# Altium PCB ATLAS_XP2V5.2016.11.14_BACKUP.PcbDoc (part 2 of 3)
Units mil, origin at the board's own origin, x right, y up, seen from the top; angles counter-clockwise.
Board outline 6300 x 9190 mil, 4 copper layers (Primary Component Side, Ground Plane, Power Plane, Secondary Component Side), stack 35.4 mil thick; 150 components, 228 nets, 1053 pads, 279 vias.
Unrouted connection lines stored in the file: 9.
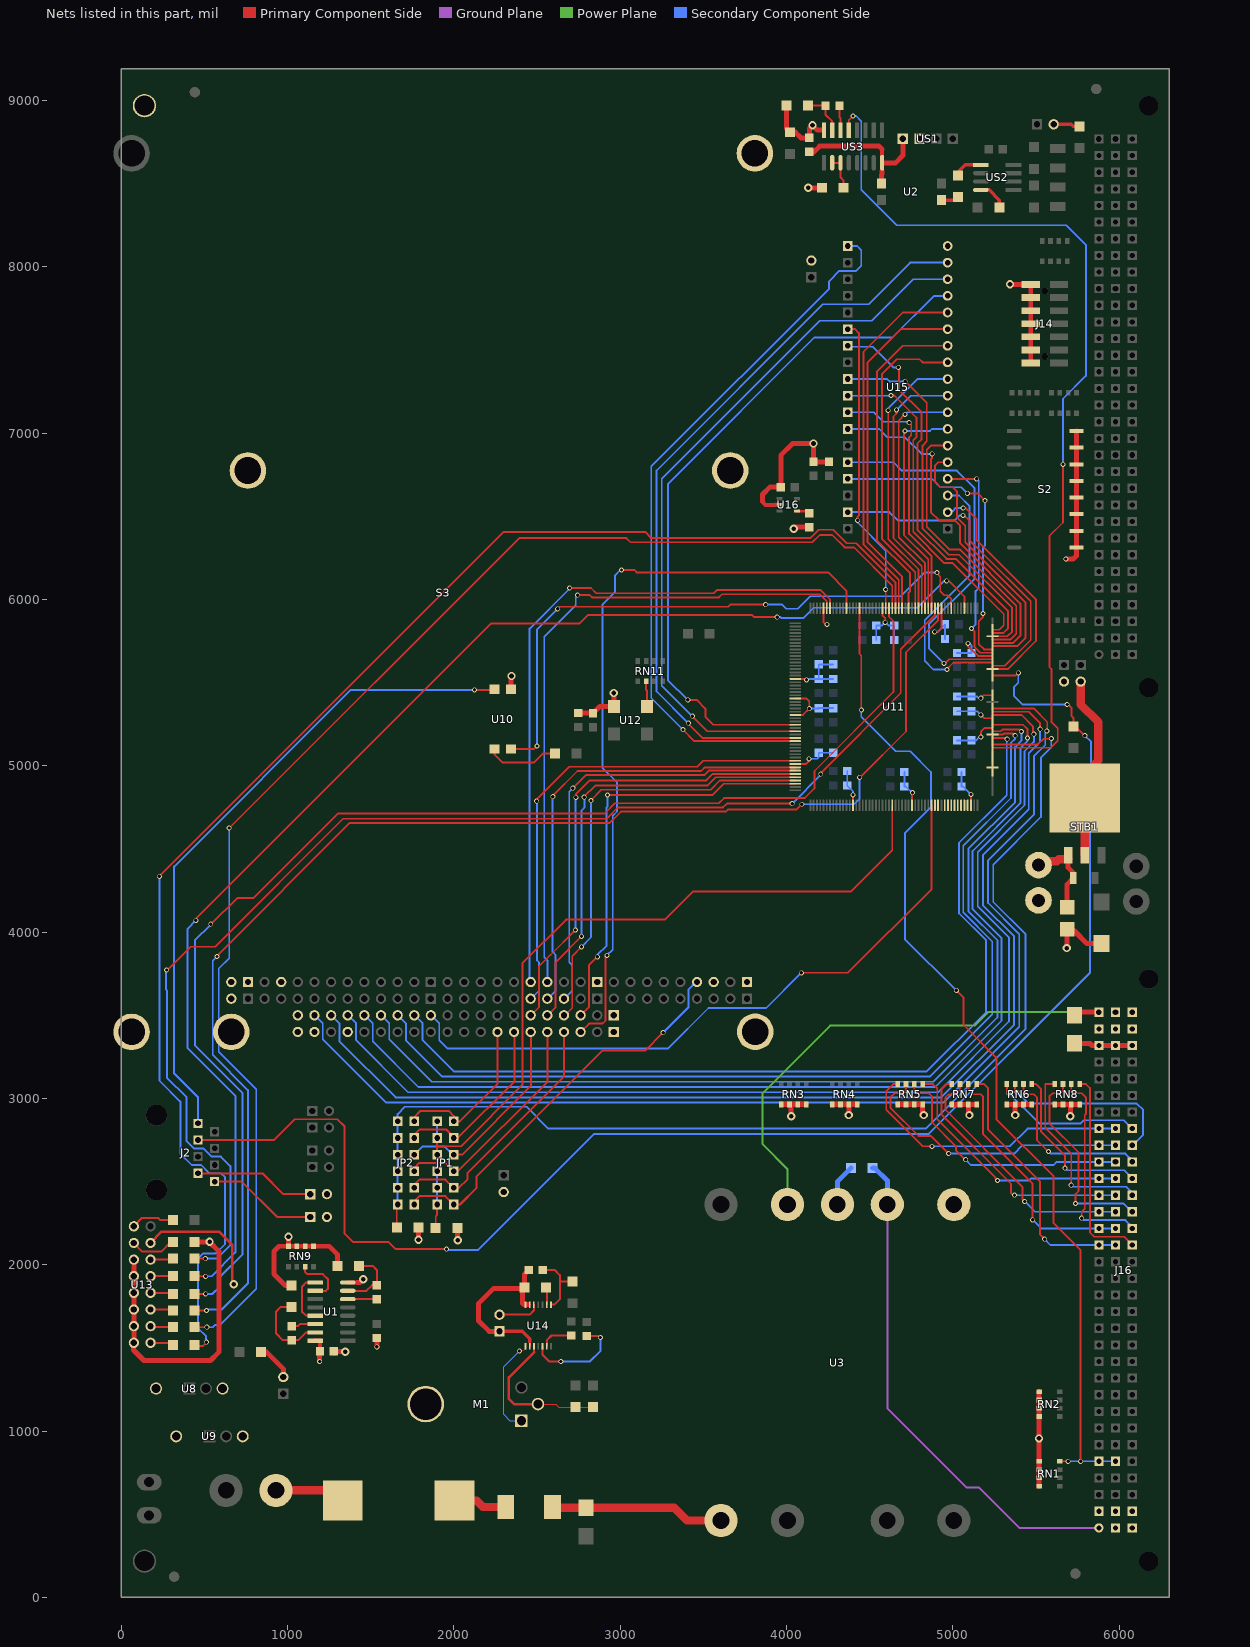
[diagram p4: the nets of this part, all layers, seen from the top]

## Via types
v1: diameter 30, hole 20, Primary Component Side to Secondary Component Side, 245 vias
v2: diameter 50, hole 28, Primary Component Side to Secondary Component Side, 34 vias

## Nets (pads, with @x,y where several pads share a name; then routed paths per layer and width w, separated by ;. In a path a pad name is that pad's centre, name@x,y a point inside that pad or via, vN(x,y) a via of type N, cw(c..) or ccw(c..) an arc to the next point about the centre after c; other vN are vias at no path point) (continued)
DATA_ISA8: S3.C11 U11.38 | length 4052.1
  Primary Component Side w11: v1(4089.16,3755.39) 4369.66,3755.39 4872.65,4258.38 U11.38@4872.65,4762.5
  Secondary Component Side w11: S3.C11@1863.75,3500 1912.5,3451.25 1912.5,3350 1962.5,3300 3287.5,3300 3531.25,3543.75 3877.52,3543.75 v1(4089.16,3755.39)
DATA_ISA9: S3.C12 U11.69 | length 5703.1
  Primary Component Side w11: U11.69@5238.45,5167.7 5318.3,5167.7 5326,5160 v1(5327,5160)
  Secondary Component Side w11: S3.C12@1763.75,3500 1812.5,3451.25 1812.5,3350 2000,3162.5 4843.75,3162.5 5200,3518.75 5200,3950 5037.5,4112.5 5037.5,4537.5 5324,4824 5324,5157 v1(5327,5160)
DATA_ISA10: S3.C13 U11.70 | length 5962.4
  Primary Component Side w11: U11.70@5238.45,5187.4 5299.9,5187.4 5306.25,5193.75 5362.5,5193.75 v1(5375,5181.25)
  Secondary Component Side w11: S3.C13@1663.75,3500 1712.5,3451.25 1712.5,3350 1931.25,3131.25 4862.5,3131.25 5237.5,3506.25 5237.5,3943.75 5062.5,4118.75 5062.5,4518.75 5350,4806.25 5350,5137.5 5375,5162.5 v1(5375,5181.25)
DATA_ISA11: S3.C14 U11.71 | length 6194.2
  Primary Component Side w11: U11.71@5238.45,5207.1 5288.35,5207.1 5300,5218.75 5400,5218.75 v1(5412.5,5206.25)
  Secondary Component Side w11: S3.C14@1563.75,3500 1612.5,3451.25 1612.5,3356.25 1868.75,3100 4881.25,3100 5268.75,3487.5 5268.75,3950 5093.75,4125 5093.75,4500 5375,4781.25 5375,5112.5 5412.5,5150 v1(5412.5,5206.25)
DATA_ISA12: S3.C15 U11.73 | length 6420.9
  Primary Component Side w11: U11.73@5238.45,5246.5 5422.25,5246.5 5450,5218.75 5450,5168 v1(5449,5167)
  Secondary Component Side w11: S3.C15@1463.75,3500 1512.5,3451.25 1512.5,3343.75 1787.5,3068.75 4893.75,3068.75 5293.75,3468.75 5293.75,3962.5 5118.75,4137.5 5118.75,4487.5 5406.25,4775 5406.25,5106.25 5450,5150 5450,5166 v1(5449,5167)
DATA_ISA13: S3.C16 U11.76 | length 6666.7
  Primary Component Side w11: U11.76@5238.45,5305.6 5413.15,5305.6 5482,5236.75 5482,5195 v1(5487,5190)
  Secondary Component Side w11: S3.C16@1363.75,3500 1412.5,3451.25 1412.5,3350 1725,3037.5 4912.5,3037.5 5337.5,3462.5 5337.5,3968.75 5150,4156.25 5150,4481.25 5431.25,4762.5 5431.25,5087.5 5487.5,5143.75 5487.5,5189.5 v1(5487,5190)
DATA_ISA14: S3.C17 U11.77 | length 6901.4
  Primary Component Side w11: U11.77@5238.45,5325.3 5455.95,5325.3 5525,5256.25 v1(5525,5220)
  Secondary Component Side w11: S3.C17@1263.75,3500 1312.5,3451.25 1312.5,3343.75 1650,3006.25 4931.25,3006.25 5368.75,3443.75 5368.75,3975 5181.25,4162.5 5181.25,4462.5 5456.25,4737.5 5456.25,5075 5525,5143.75 v1(5525,5220)
DATA_ISA15: S3.C18 U11.78 | length 7118.7
  Primary Component Side w11: U11.78@5238.45,5345 5486.25,5345 5568,5263.25 5568,5212 v1(5565,5209)
  Secondary Component Side w11: S3.C18@1163.75,3500 1212.5,3451.25 1212.5,3356.25 1593.75,2975 4943.75,2975 5400,3431.25 5400,3987.5 5212.5,4175 5212.5,4431.25 5487.5,4706.25 5487.5,5056.25 5556.25,5125 5556.25,5200.25 v1(5565,5209)
DATA_MAX0: U11.39
DATA_MAX1: U11.40
DATA_MAX2: U11.42
DATA_MAX3: U11.43
DATA_MAX4: U11.44
DATA_MAX5: U11.45
DATA_MAX6: U11.46
DATA_MAX7: U11.47
DATA_MAX8: U11.48
DATA_MAX9: U11.49
DATA_MAX10: U11.59
DATA_MAX11: U11.60
DATA_MAX12: U11.61
DATA_MAX13: U11.62
DATA_MAX14: U11.64
DATA_MAX15: U11.65
DATA_MAX_BUS0: J16.B8 J16.C8 RN5.8 | length 1712
  Primary Component Side w11: RN5.8@4668.75,3086.5 4642.75,3086.5 4600,3043.75 4600,2931.25 4818.75,2712.5 v1(4875,2712.5)
  Secondary Component Side w11: v1(4875,2712.5) 5343.75,2712.5 5449.75,2818.5 J16.C8@5878.5,2818.5 J16.B8@5978.5,2818.5
DATA_MAX_BUS1: J16.A9 J16.B9 J16.C9 RN5.7 RN6.7 | length 2790.9
  Primary Component Side w11: RN5.7@4718.75,3086.5 4718.75,3056.25 4693.75,3031.25 4650,3031.25 4625,3006.25 4625,2943.75 4793.75,2775 4868.75,2775 v1(4975,2668.75) ; RN6.7@5375,3086.5 5375,3050 v1(5387.5,3037.5)
  Secondary Component Side w11: v1(4975,2668.75) 5368.75,2668.75 5418.5,2718.5 J16.C9@5878.5,2718.5 J16.B9@5978.5,2718.5 ; v1(5387.5,3037.5) 5456.25,2968.75 6106.25,2968.75 6143.75,2931.25 6143.75,2781.25 6081,2718.5 J16.A9@6078.5,2718.5
DATA_MAX_BUS2: J16.A10 J16.B10 J16.C10 RN5.6 RN6.6 | length 2566.6
  Primary Component Side w11: RN5.6@4768.75,3086.5 4768.75,3056.25 4793.75,3031.25 4856.25,3031.25 4875,3012.5 4875,2856.25 5018.75,2712.5 5018.75,2688.25 5075,2632 v1(5077,2632) ; RN6.6@5425,3086.5 5425,3050 5450,3025 5487.5,3025 5506.25,3006.25 5506.25,2750 v1(5575,2681.25)
  Secondary Component Side w11: v1(5077,2632) 5109,2600 5606.25,2600 5624.75,2618.5 J16.C10@5878.5,2618.5 J16.B10@5978.5,2618.5 ; v1(5575,2681.25) 5587.5,2668.75 6037.5,2668.75 6078.5,2627.75 J16.A10@6078.5,2618.5
DATA_MAX_BUS3: J16.A11 J16.B11 J16.C11 RN5.5 RN6.5 | length 2552.1
  Primary Component Side w11: RN5.5@4818.75,3086.5 4880.25,3086.5 4906.25,3060.5 4906.25,2875 5256.25,2525 5256.25,2518.75 5268,2507 v1(5268.75,2507) ; RN6.5@5475,3086.5 5501,3086.5 5531.25,3056.25 5531.25,2800 5675,2656.25 v1(5675,2581.25)
  Secondary Component Side w11: v1(5268.75,2507) 5455.5,2507 5456.25,2506.25 5468.5,2518.5 J16.C11@5878.5,2518.5 J16.B11@5978.5,2518.5 ; v1(5675,2581.25) 5687.5,2568.75 6031.25,2568.75 6078.5,2521.5 J16.A11@6078.5,2518.5
DATA_MAX_BUS4: C6.1 C7.1 C42.1 D3.2 D4.2 J3.2 J16.A1 J16.A2 J16.A12 J16.B1 J16.B2 J16.B12 J16.C1 J16.C2 J16.C12 M1.2 M1.4 R2.1 R4.1 R5.1 R6.1 R7.1 R13.1 R14.1 R27.1 R28.1 RN1.1 RN1.2 RN1.3 RN1.4 RN2.1 RN2.2 RN2.3 RN2.4 RN3.1 RN3.2 RN3.3 RN3.4 RN4.1 RN4.2 RN4.3 RN4.4 RN5.1 RN5.2 RN5.3 RN5.4 RN6.1 RN6.2 RN6.3 RN6.4 RN7.1 RN7.2 RN7.3 RN7.4 RN7.8 RN8.1 RN8.2 RN8.3 RN8.4 RN8.8 RN9.1 RN9.2 RN9.3 RN9.4 S3.B3 S3.B29 S3.D16 STB1.1 U1.16 U3.6 U8.3 U13.7 U14.10 UR3.1 UR4.1 US1.2 US3.16 | length 11549.2
  Primary Component Side w6: M1.2@2506.25,1162.5 2613.12,1162.5 2631.88,1143.75 R28.1@2731.25,1143.75 R27.1@2837.5,1143.75
  Primary Component Side w11: RN7.8@4993.75,3086.5 4961.5,3086.5 4931.25,3056.25 4931.25,2906.25 5350,2487.5 5350,2431.25 5362.25,2419 v1(5371,2419) ; RN8.8@5612.5,3086.5 5556.25,3086.5 5556.25,2825 5712.5,2668.75 5712.5,2479.5 v1(5712,2479)
  Primary Component Side w12: 2482.42,1473.83 U14.10@2482.42,1508.98
  Primary Component Side w15: U13.7@177,2131.25 243.75,2200 587.5,2200 668.75,2118.75 668.75,1892.25 v2(678,1883) ; 2482.42,1473.83 2331.25,1322.67 2331.25,1193.75 2362.5,1162.5 M1.2@2506.25,1162.5
  Primary Component Side w25: U1.16@1166.5,1543.75 1195.36,1543.75 C6.1@1195.36,1479.38 ; 4208.5,8821 US3.16@4225,8821
  Primary Component Side w30: v2(1006.25,2168.75) RN9.4@1006.25,2111.5 ; R13.1@1025,1875 987.5,1875 918.75,1943.75 918.75,2081.25 949,2111.5 RN9.4@1006.25,2111.5 ; v1(1193.75,1418.75) 1193.75,1479.38 C6.1@1195.36,1479.38 ; R14.1@1300,1993.75 1300,2062.5 1251,2111.5 RN9.1@1156.25,2111.5 RN9.2@1106.25,2111.5 RN9.3@1056.25,2111.5 RN9.4@1006.25,2111.5 ; v2(1787.5,2150) R7.1@1787.5,2225 ; R4.1@2021.25,2221.25 2021.25,2149.75 v2(2023,2148) ; RN3.1@3968.75,2963.5 RN3.2@4018.75,2963.5 ; R5.1@4000,8968.75 4000,8830 R2.1@4021.25,8808.75 4053.75,8808.75 4087.5,8775 C7.1@4137.5,8775 4137.5,8831.25 v2(4156.25,8850) 4185.25,8821 4208.5,8821 ; v2(4028,2893) 4028,2954.25 RN3.2@4018.75,2963.5 ; RN3.4@4118.75,2963.5 RN3.3@4068.75,2963.5 RN3.2@4018.75,2963.5 ; v2(4131.25,8475) R6.1@4212.5,8475 ; RN4.1@4275,2963.5 RN4.2@4325,2963.5 RN4.3@4375,2963.5 ; v2(4375,2900) RN4.3@4375,2963.5 ; RN4.4@4425,2963.5 RN4.3@4375,2963.5 ; RN5.1@4668.75,2963.5 RN5.2@4718.75,2963.5 RN5.3@4768.75,2963.5 RN5.4@4818.75,2963.5 4818.75,2906.25 v2(4825,2900) ; RN7.1@4993.75,2963.5 RN7.2@5043.75,2963.5 RN7.3@5093.75,2963.5 ; v2(5100,2900) 5093.75,2906.25 RN7.3@5093.75,2963.5 ; RN7.4@5143.75,2963.5 RN7.3@5093.75,2963.5 ; RN6.1@5325,2963.5 RN6.2@5375,2963.5 ; v2(5375,2900) RN6.2@5375,2963.5 ; RN6.4@5475,2963.5 RN6.3@5425,2963.5 RN6.2@5375,2963.5 ; RN1.4@5519.75,668.75 RN1.3@5519.75,718.75 RN1.2@5519.75,768.75 RN1.1@5519.75,818.75 5519.75,881.5 5518.75,882.5 v2(5518.75,956.25) 5519.75,957.25 RN2.4@5519.75,1087.5 RN2.3@5519.75,1137.5 RN2.2@5519.75,1187.5 RN2.1@5519.75,1237.5 ; RN8.1@5612.5,2963.5 RN8.2@5662.5,2963.5 RN8.3@5712.5,2963.5 ; C42.1@5687.5,4150 5687.5,4287.5 D4.2@5725,4325 5725,4356.25 5693.75,4387.5 5693.75,4437.5 STB1.1@5693.75,4462.5 ; v2(5706.25,2893.75) 5706.25,2957.25 RN8.3@5712.5,2963.5 ; D3.2@5731.25,3501.25 5731.25,3506 5743.75,3518.5 J16.C1@5878.5,3518.5 ; RN8.4@5762.5,2963.5 RN8.3@5712.5,2963.5
  Primary Component Side w50: UR4.1@5515.62,4403.12 5515.62,4426.37 5626.62,4426.37 5637.75,4437.5 STB1.1@5693.75,4437.5
  Ground Plane w30: v2(678,1883) v2@679.75,1881.25 ; v2@2021,2150 v2(2023,2148) ; v2@4368,2893 v2(4375,2900)
  Ground Plane w50: J16.C1@5878.25,3518.75 J16.C1@5878.5,3518.5
  Power Plane w12: U3.6@4006.25,2362.5 4006.25,2575 3856.25,2725 3856.25,3031.25 4262.5,3437.5 5131.25,3437.5 5212.25,3518.5 J16.C1@5878.5,3518.5
  Secondary Component Side w11: v1(5371,2419) 5370.5,2418.5 J16.C12@5878.5,2418.5 J16.B12@5978.5,2418.5 ; v1(5712,2479) 5712,2475.5 5718.75,2468.75 6043.75,2468.75 6078.5,2434 J16.A12@6078.5,2418.5
DATA_MAX_BUS5: J16.A13 J16.B13 J16.C13 RN7.7 RN8.7 | length 2751.8
  Primary Component Side w11: RN7.7@5043.75,3086.5 5043.75,3056.25 5012.5,3025 4975,3025 4956.25,3006.25 4956.25,2931.25 5418.75,2468.75 5418.75,2393.75 5431.5,2381 v1(5432,2381) ; RN8.7@5662.5,3086.5 5662.5,3050 5643.75,3031.25 5600,3031.25 5581.25,3012.5 5581.25,2850 5756.25,2675 5756.25,2443.75 5738,2425.5 v1(5738,2369)
  Secondary Component Side w11: v1(5432,2381) 5494.25,2318.5 J16.C13@5878.5,2318.5 J16.B13@5978.5,2318.5 ; v1(5738,2369) 5738.25,2368.75 6025,2368.75 6075.25,2318.5 J16.A13@6078.5,2318.5
DATA_MAX_BUS6: J16.A14 J16.B14 J16.C14 RN7.6 RN8.6 | length 2734.5
  Primary Component Side w11: RN7.6@5093.75,3086.5 5093.75,3056.25 5125,3025 5168.75,3025 5181.25,3012.5 5181.25,2787.5 5480,2488.5 v1(5480,2270.75) ; RN8.6@5712.5,3086.5 5712.5,3050 5731.25,3031.25 5775,3031.25 5800,3006.25 5800,2906.25 5793.75,2900 5793.75,2337.5 5775,2318.75 v1(5775,2280)
  Secondary Component Side w11: v1(5480,2270.75) 5532.5,2218.5 J16.C14@5878.5,2218.5 J16.B14@5978.5,2218.5 ; v1(5775,2280) 5786.25,2268.75 6037.5,2268.75 6078.5,2227.75 J16.A14@6078.5,2218.5
DATA_MAX_BUS7: J16.A15 J16.B15 J16.C15 RN7.5 RN8.5 | length 2796.6
  Primary Component Side w11: RN7.5@5143.75,3086.5 5188.5,3086.5 5212.5,3062.5 5212.5,2812.5 5525,2500 5525,2181 v1(5552,2154) ; RN8.5@5762.5,3086.5 5801,3086.5 5825,3062.5 5825,2193.75 5850,2168.75 6031.25,2168.75 6078.5,2121.5 J16.A15@6078.5,2118.5
  Secondary Component Side w11: v1(5552,2154) 5587.5,2118.5 J16.C15@5878.5,2118.5 J16.B15@5978.5,2118.5
DATA_MAX_BUS8: J16.A8 RN6.8 | length 905.1
  Primary Component Side w11: RN6.8@5325,3086.5 5325,3043.75 v1(5337.5,3031.25)
  Secondary Component Side w11: v1(5337.5,3031.25) 5518.75,2850 5768.75,2850 5787.5,2868.75 6028.25,2868.75 J16.A8@6078.5,2818.5
E/D: RN11.6 U12.1 | length 153.6
  Primary Component Side w11: RN11.6@3156.25,5507.25 3156.25,5456.25 3162.5,5450 U12.1@3162.5,5356.25
GND: C6.2 C7.2 C9.2 C10.2 C13.2 C14.2 C15.2 C16.2 C17.2 C18.2 C19.2 C20.2 C21.2 C22.2 C23.2 C24.2 C25.2 C26.2 C27.2 C28.2 C29.2 C30.2 C31.2 C32.2 C33.2 C34.2 C35.2 C36.2 C37.2 C38.2 C39.2 C40.2 C41.2 C42.2 C43.1 C46.2 C47.2 C48.2 C49.2 C50.2 D3.1 J4.2 J11.2 J13.2 J14.1 J14.3 J14.5 J14.7 J14.9 J14.11 J14.13 J15.1 J16.A3 J16.A31 J16.A32 J16.B3 J16.B31 J16.B32 J16.C3 J16.C31 J16.C32 J18.2 JP4.2 JP5.2 R9.2 R12.2 R23.2 R29.1 S2.9 S2.10 S2.11 S2.12 S2.13 S2.14 S2.15 S2.16 S3.A32 S3.B1 S3.B10 S3.B31 S3.B32 S3.C0 S3.C19 S3.D0 S3.D18 S3.D19 S3.MTH1 S3.MTH2 S3.MTH3 S3.MTH4 S3.MTH5 S3.MTH7 STB1.2 STB1.4 U1.8 U2.3 U3.8 U3.9 U4.1 U8.4 U9.3 U9.4 U10.3 U11.14 U11.32 U11.50 U11.72 U11.75 U11.82 U11.94 U11.116 U11.134 U11.152 U11.174 U11.180 U11.185 U11.200 U12.2 U13.9 U13.10 U13.11 U13.12 U13.13 U13.14 U14.6 U14.7 U14.9 U15.18 U16.2 US1.1 US3.8 | length 15854.4
  Primary Component Side w11: 2448,1760.5 U14.6@2457.25,1760.5 ; U11.200@4053.75,5010.1 4116.35,5010.1 4136,5029.75 v1(4136,5042) ; U11.185@4053.75,5305.6 4099.35,5305.6 v1(4137.5,5343.75) 4137.5,5387.5 4120.9,5404.1 U11.180@4053.75,5404.1 ; U11.174@4053.75,5522.3 4115.7,5522.3 v1(4121,5517) ; U11.152@4222.55,5947.2 4222.55,5863 4235.55,5850 v1(4243.75,5850) ; U11.14@4399.85,4762.5 4400,4819.05 v1(4400,4825) ; U11.134@4577.15,5947.2 4577.15,5904.1 4593.75,5887.5 v1(4593.75,5862.5) ; U11.32@4754.45,4762.5 4754.45,4834.45 v1(4758,4838) ; v1(4891,5805) 4889.75,5806.25 4912.5,5806.25 4931.75,5825.5 U11.116@4931.75,5947.2 ; v1(5091,5736) 5091,5718.75 5152.3,5660.2 U11.94@5238.45,5660.2 ; v1(5168.75,5306.25) 5189.1,5285.9 U11.75@5238.45,5285.9 ; v1(5168.75,5406.25) 5186.3,5423.8 U11.82@5238.45,5423.8 ; v1(5169,5173) 5170,5174 5170,5207.5 5189.3,5226.8 U11.72@5238.45,5226.8
  Primary Component Side w12: U14.9@2456.83,1508.98 2456.83,1536.92 ; U11.50@5109.05,4762.5 v1(5109.05,4828.45)
  Primary Component Side w20: J15.1@2275,1600 2412.5,1600 2456.83,1555.67 2456.83,1536.92 ; 3937.6,6568.85 U16.2@3957.5,6568.85
  Primary Component Side w25: U1.8@1362.5,1893.75 1418.75,1893.75 ; 3856.25,6587.5 3875,6568.75 3937.5,6568.75 3937.6,6568.85 ; 4575,8575 US3.8@4575,8625 ; 4575,8706.25 US3.8@4575,8625 ; 4587.5,8625 US3.8@4575,8625
  Primary Component Side w30: U13.14@77,2031.25 U13.13@77,1931.25 U13.12@77,1831.25 U13.11@77,1731.25 U13.10@77,1631.25 U13.9@77,1531.25 75,1487.5 137.5,1425 537.5,1425 587.5,1475 587.5,2081.5 531.5,2137.5 v2(532,2138) 443,2138 R23.2@442.5,2137.5 ; R12.2@842.5,1475 875,1475 975,1375 JP4.2@975,1325 ; C6.2@1279.36,1479.38 1279.36,1469.38 1289.36,1469.38 1299.22,1479.23 1348.28,1479.23 v2(1348.28,1478.06) 1350,1476.34 v2@1350,1468.75 ; 1418.75,1893.75 1437.5,1893.75 v2(1456.25,1912.5) ; C10.2@1537.5,1559.75 1537.5,1507.59 1537.85,1507.59 v1(1537.85,1507.04) ; J15.1@2275,1600 2212.5,1600 2150,1662.5 2150,1768.75 2237.5,1856.25 R29.1@2418.75,1856.25 ; U10.3@2343.75,5460 2343.75,5536.75 v2(2347,5540) ; 2448,1760.5 U14.7@2431.25,1760.5 2420.75,1760.5 2412.5,1768.75 2412.5,1850 R29.1@2418.75,1856.25 ; C43.1@2450,1968.75 2425,1943.75 R29.1@2425,1862.5 R29.1@2418.75,1856.25 ; C39.2@2748.25,5317 2835.75,5317 C48.2@2837.5,5315.25 2878.5,5356.25 U12.2@2962.5,5356.25 v2(2962.5,5437.5) ; 3856.25,6587.5 3856.25,6631.25 3900,6675 C13.2@3966,6675 3966,6866 4037.5,6937.5 v2(4162.5,6937.5) C46.2@4162.5,6827.75 C9.2@4256.25,6827.75 ; v2(4043.75,6425) 4053.5,6434.75 C49.2@4137.5,6434.75 ; C7.2@4137.5,8691 4166,8691 4200,8725 4556.25,8725 4575,8706.25 ; U2.3@4571.25,8500 4571.25,8552.5 4575,8556.25 4575,8575 ; 4587.5,8625 4656.25,8625 4700,8668.75 US1.1@4700,8768.75 ; v2(5344,7895) 5343.75,7894.75 5343.75,7893.75 J14.1@5468.75,7893.75 J14.3@5468.75,7815.05 J14.5@5468.75,7736.25 J14.7@5468.75,7657.53 J14.9@5468.75,7578.75 J14.11@5468.75,7500.05 J14.13@5468.75,7421.32 ; v1(5680,6243) 5724.25,6243 5743.75,6262.5 S2.9@5743.75,6312.5 S2.10@5743.75,6412.5 S2.11@5743.75,6512.5 S2.12@5743.75,6612.5 S2.13@5743.75,6712.5 S2.14@5743.75,6812.5 S2.15@5743.75,6912.5 S2.16@5743.75,7012.5 ; v2(5686,3904) 5687.5,3902.5 C42.2@5687.5,4018 5718.75,4018 5730.5,4006.25 5731.25,4006.25 5806.25,3931.25 C41.2@5893.75,3931.25 ; D3.1@5731.25,3331.25 5825,3331.25 5837.25,3318.5 J16.C3@5878.5,3318.5 J16.B3@5978.5,3318.5 J16.A3@6078.5,3318.5 ; STB1.4@5793.75,4806.25 STB1.4@5918.75,4806.25
  Primary Component Side w50: J11.2@5768.75,5506.25 5768.75,5368.75 5875,5262.5 5875,5031.25 5793.75,4950 STB1.4@5793.75,4806.25 STB1.2@5793.75,4462.5
  Ground Plane w12: U3.8@4606.25,2362.5 4606.25,1137.5 5081.25,662.5 5156.25,662.5 5400.25,418.5 J16.C32@5878.5,418.5
  Power Plane w11: v1(4121,5517) 4121,5521.85 v1@4121.45,5522.3 ; v1@4136,5039 v1(4136,5042) ; v1(4758,4838) v1@4762.5,4842.5 ; v1(4891,5805) v1@4893.75,5802.25
  Power Plane w30: v2(532,2138) v2@532.5,2137.5 ; v2(2347,5540) v2@2348,5541 ; v2@5344,7894 v2(5344,7895) ; J13.2@5668.75,5506.25 J13.2@5668.75,5512.5 ; J16.C3@5878.25,3318.75 J16.C3@5878.5,3318.5
  Secondary Component Side w11: v1(4121,5517) 4126.3,5521.5 C37.2@4193.75,5521.5 ; v1(4136,5042) 4185.75,5042 4193.75,5050 C35.2@4193.75,5078.5 C14.2@4281.25,5078.5 ; v1(4137.5,5343.75) 4191,5343.75 C15.2@4193.75,5346.5 ; C15.2@4190.25,5346.5 C15.2@4193.75,5346.5 ; C36.2@4281.25,5346.5 C15.2@4193.75,5346.5 ; C18.2@4281.25,5521.5 C37.2@4193.75,5521.5 ; C19.2@4281.25,5609.75 C38.2@4193.75,5609.75 C37.2@4193.75,5521.5 ; C27.2@4365.25,4968.75 C16.2@4365.25,4881.25 4400,4846.5 v1(4400,4825) ; C20.2@4540.25,5756.25 C50.2@4540.25,5843.75 4575,5843.75 v1(4593.75,5862.5) 4612.5,5843.75 C40.2@4647.25,5843.75 C21.2@4647.25,5756.25 ; C25.2@4709,4962.5 C17.2@4709,4875 4718.75,4875 4755.75,4838 v1(4758,4838) ; v1(4891,5805) 4908.5,5805 C34.2@4953.5,5850 C22.2@4953.5,5762.5 ; C24.2@5025,5327.75 C30.2@5112.5,5327.75 5147.25,5327.75 v1(5168.75,5306.25) ; C23.2@5025,5416 C32.2@5112.5,5416 5146.5,5416 5156.25,5406.25 v1(5168.75,5406.25) ; C26.2@5025,5677.75 C33.2@5112.5,5677.75 5112.5,5725 5101.5,5736 v1(5091,5736) ; C29.2@5052.75,4875 C29.2@5056.25,4875 ; C47.2@5052.75,4962.5 5052.75,4878.5 C29.2@5056.25,4875 ; v1(5109.05,4828.45) 5062.5,4875 C29.2@5056.25,4875 ; C31.2@5112.5,5152.75 5140.25,5152.75 5160.75,5173.25 5168.75,5173.25 v1(5169,5173)
  Secondary Component Side w12: C28.2@5025,5152.75 C31.2@5112.5,5152.75
  Secondary Component Side w30: R9.2@4517.5,2581.25 4531.25,2581.25 4606.25,2506.25 U3.8@4606.25,2362.5
IOCS16: S3.D2 U11.145 | length 4524.8
  Primary Component Side w11: S3.D2@2750,3400 S3.D2@2762.5,3400 2763.75,3400 2813.75,3450 2893.75,3450 2912.5,3468.75 2912.5,3851.5 v1(2921,3860) ; v1(3008,6177) 3086.75,6177 3099.25,6162.5 4251.25,6162.5 4360.45,6052.05 U11.145@4360.45,5947.2
  Secondary Component Side w11: v1(2921,3860) 2956.25,3895.25 2956.25,4700 2981.25,4725 2981.25,4900 2893.75,4987.5 2893.75,5968.75 2968.75,6043.75 2968.75,6143.75 3002,6177 v1(3008,6177)
IORD: S3.B14 U11.150 | length 4134
  Primary Component Side w11: v1(2697,6069) 2697.25,6068.75 2825,6068.75 2856.25,6037.5 3562.5,6037.5 3581.25,6056.25 4206.25,6056.25 4261.95,6000.55 U11.150@4261.95,5947.2
  Secondary Component Side w11: S3.B14@2463.75,3700 2456.25,3707.5 2456.25,5825 2697,6065.75 v1(2697,6069)
IOWR: S3.B13 U11.151 | length 3988.2
  Primary Component Side w11: v1(2745.25,6026) 2817.75,6026 2831.25,6012.5 3593.75,6012.5 3612.5,6031.25 4200,6031.25 4242.25,5989 U11.151@4242.25,5947.2
  Secondary Component Side w11: S3.B13@2563.75,3700 S3.B13@2562.5,3700 2562.5,3831.25 2543.75,3850 2543.75,5775 2733,5964.25 2733,6014 v1(2745.25,6026)
IQ_I_SYN: U11.66 US3.13 | length 5561
  Primary Component Side w11: US3.13@4375,8821 4375,8881.25 v1(4400,8906.25) ; U11.66@5238.45,5108.6 5589.65,5108.6 5631.25,5149.7 5631.25,5225.3 5593.75,5262.3 5593.75,5581.25 5581.25,5593.75 5581.25,6381.25 5662.5,6462.5 v1(5662.5,6812.5)
  Secondary Component Side w11: v1(4400,8906.25) 4418.75,8906.25 4450,8875 4450,8462.5 4662.5,8250 5681.25,8250 5800,8131.25 5800,7343.75 5662.5,7206.25 v1(5662.5,6812.5)
IQ_O_ATP: JP1.2 JP1.4 JP1.6 JP1.8 JP1.10 JP1.12 R4.2 U11.26 | length 4816.8
  Primary Component Side w11: R4.2@1891.25,2221.25 1891.25,2291.25 1900,2300 JP1.2@1900,2362.5 ; JP1.8@1900,2662.5 1900,2712.5 ; JP1.10@1900,2762.5 1900,2712.5 ; U11.26@4636.25,4762.5 4636.25,4492.5 4387.5,4243.75 3437.5,4243.75 3268.75,4075 2675,4075 2412.5,3812.5 2412.5,3081.25 2043.75,2712.5 1900,2712.5
  Secondary Component Side w11: JP1.2@1900,2362.5 JP1.4@1900,2462.5 JP1.6@1900,2562.5 JP1.8@1900,2662.5 ; JP1.10@1900,2762.5 JP1.12@1900,2862.5
IQ_O_SYN: JP2.2 JP2.4 JP2.6 JP2.8 JP2.10 JP2.12 R7.2 U11.67 | length 7117.6
  Primary Component Side w11: R7.2@1657.5,2225 1657.5,2357.5 JP2.2@1662.5,2362.5 ; U11.67@5238.45,5128.3 5511.38,5128.3 5545.58,5162.5 5591.03,5162.5 v1(5592,5164)
  Secondary Component Side w11: JP2.2@1662.5,2362.5 JP2.4@1662.5,2462.5 JP2.6@1662.5,2562.5 JP2.8@1662.5,2662.5 JP2.10@1662.5,2762.5 JP2.12@1662.5,2862.5 1662.5,2906.25 1706.25,2950 2437.5,2950 2568.75,2818.75 4837.5,2818.75 5437.5,3418.75 5437.5,3987.5 5243.75,4181.25 5243.75,4406.25 5529.5,4692 5529.5,5048.25 5592,5110.75 v1(5592,5164)
IRQ9: JP1.1 JP2.1 S3.B4 | length 2410.5
  Primary Component Side w12: JP2.1@1762.5,2362.5 1762.5,2381.25 1793.75,2412.5 1950,2412.5 JP1.1@2000,2362.5 2037.5,2362.5 2137.5,2462.5 2137.5,2531.25 2893.75,3287.5 3150,3287.5 3256.5,3394 3257,3394 v1(3259,3396)
  Secondary Component Side w12: v1(3259,3396) 3261,3398 3261,3398.5 3412.5,3550 3412.5,3656.25 3456.25,3700 S3.B4@3462.5,3700 S3.B4@3463.75,3700
IRQ10: JP1.3 JP2.3 S3.D3 | length 1520.6
  Primary Component Side w12: JP2.3@1762.5,2462.5 1762.5,2481.25 1793.75,2512.5 1950,2512.5 JP1.3@2000,2462.5 2031.25,2462.5 2081.25,2512.5 2081.25,2550 2663.75,3132.5 S3.D3@2663.75,3400
IRQ11: JP1.5 JP2.5 S3.D4 | length 1375.7
  Primary Component Side w12: JP2.5@1762.5,2562.5 1762.5,2581.25 1793.75,2612.5 1950,2612.5 JP1.5@2000,2562.5 2024.65,2562.5 2563.75,3100.35 S3.D4@2563.75,3400
IRQ12: JP1.7 JP2.7 S3.D5 | length 1238.1
  Primary Component Side w12: JP1.7@2000,2662.5 2049.83,2662.5 2463.75,3075.17 S3.D5@2463.75,3400
  Secondary Component Side w12: JP2.7@1762.5,2662.5 1812.5,2712.5 1943.75,2712.5 1993.75,2662.5 JP1.7@2000,2662.5
IRQ14: JP1.11 JP2.11 S3.D7 | length 991.1
  Primary Component Side w12: JP2.11@1762.5,2862.5 1762.5,2887.5 1800,2925 1968.75,2925 2000,2893.75 JP1.11@2000,2862.5 2037.12,2862.5 2263.75,3087.88 S3.D7@2263.75,3400
IRQ15: JP1.9 JP2.9 S3.D6 | length 1096.6
  Primary Component Side w12: JP2.9@1762.5,2762.5 1762.5,2781.25 1793.75,2812.5 1956.25,2812.5 2000,2768.75 JP1.9@2000,2762.5 2024.72,2762.5 2363.75,3100.27 S3.D6@2363.75,3400
LA17: S3.A14 U11.199 | length 2876
  Primary Component Side w11: v1(2498,4787) 2498,4798 2693.75,4993.75 3462.5,4993.75 3498.55,5029.8 U11.199@4053.75,5029.8
  Secondary Component Side w11: S3.A14@2463.75,3600 2512.5,3648.75 2512.5,3818.75 2500,3831.25 2500,4785 v1(2498,4787)
LA18: S3.A13 U11.201 | length 2779.3
  Primary Component Side w11: v1(2596,4814) 2596,4821 2743.73,4968.73 3487.5,4968.75 3509.15,4990.4 U11.201@4053.75,4990.4
  Secondary Component Side w11: S3.A13@2563.75,3600 2612.5,3648.75 2612.5,3862.5 2593.75,3881.25 2593.75,4812.5 2596,4814.75 v1(2596,4814)
LA19: S3.A12 U11.202 | length 2684.9
  Primary Component Side w11: v1(2716,4865) 2716,4866 2793.75,4943.75 3506.25,4943.75 3533.2,4970.7 U11.202@4053.75,4970.7
  Secondary Component Side w11: S3.A12@2663.75,3600 2712.5,3648.75 2712.5,3800 2693.75,3818.75 2693.75,4843.75 2715,4865 v1(2716,4865)
LA20: S3.C5 U11.203 | length 2810.6
  Primary Component Side w11: S3.C5@2463.75,3500 2512.5,3548.75 2512.5,3793.75 2581.25,3862.5 2581.5,3862.5 v1(2731.25,4012.25) ; v1(2734,4810) 2734,4827.75 2818.75,4912.5 3518.75,4912.5 3557.25,4951 U11.203@4053.75,4951
  Secondary Component Side w11: v1(2731.25,4012.25) 2731.25,4807.25 v1(2734,4810)
LA21: S3.C4 U11.204 | length 2725
  Primary Component Side w11: S3.C4@2563.75,3500 2612.5,3548.75 2612.5,3818.75 2612.75,3818.75 2626.94,3832.99 v1(2768,3974.5) ; v1(2784,4811) 2784,4816.2 2851.3,4881.25 3525,4881.25 3575.05,4931.3 U11.204@4053.75,4931.3
  Secondary Component Side w11: v1(2768,3974.5) 2768,4730.5 2785,4747.5 2785,4810 v1(2784,4811)
LA22: S3.C3 U11.205 | length 2641.2
  Primary Component Side w11: S3.C3@2663.75,3500 2668.75,3500 2712.5,3543.75 2712.5,3856.25 2768,3911.75 v1(2768,3912) ; v1(2825,4790) 2825,4793.75 2887.5,4856.25 3543.75,4856.25 3599.1,4911.6 U11.205@4053.75,4911.6
  Secondary Component Side w11: v1(2768,3912) 2768.25,3912 2825,3968.75 v1(2825,4790)
LA23: S3.C2 U11.206 | length 2547.8
  Primary Component Side w11: S3.C2@2763.75,3500 2812.5,3548.75 2812.5,3800.5 v1(2863,3851) ; v1(2924,4824) 2966.25,4824 2969,4825 3556.25,4825 3623.15,4891.9 U11.206@4053.75,4891.9
  Secondary Component Side w11: v1(2863,3851) 2863,3863 2918.75,3918.75 2918.75,4750 2924,4756 v1(2924,4824)
LED_KVR: R18.2 U11.131 | length 8352.9
  Primary Component Side w11: R18.2@442.5,1625 v1(515,1625) ; v1(650,4626) 651,4626 2393.75,6368.75 3037.5,6368.75 3062.5,6343.75 4156.25,6343.75 4200,6387.5 4275,6387.5 4350,6312.5 4406.25,6312.5 4636.25,6082.5 U11.131@4636.25,5947.2
  Secondary Component Side w11: v1(515,1625) 550.5,1625 563,1637.5 593.75,1637.5 812.5,1856.25 812.5,3056.25 587.5,3281.25 587.5,3781.25 650,3843.75 v1(650,4626)
LED_LPT: R20.2 U11.132 | length 7822.9
  Primary Component Side w11: 796.5,4206.25 1302.75,4712.5 2906.25,4712.5 2967,4775 3593.75,4775 3625,4806.25 4110.75,4806.25 4168.75,4864.25 4168.75,4968.75 4643.75,5443.75 4643.75,5868.75 4616.55,5895.95 U11.132@4616.55,5947.2
  Primary Component Side w12: R20.2@442.5,1825 v1(508,1825) ; v1(539,4048) 700,4206.25 796.5,4206.25
  Secondary Component Side w12: v1(508,1825) 549.55,1825 593.75,1867.68 593.75,1926.5 731.25,2064 731.25,3031.25 443.75,3318.75 443.75,3950 539,4045.25 v1(539,4048)
LED_MASTER_ENABLE: R21.2 U11.109 | length 8037.1
  Primary Component Side w11: R21.2@442.5,1931.25 508.25,1931.25 v1(508,1931) ; v1(449,4071) 449,4080.25 2225,5856.25 2756.25,5856.25 2806.25,5906.25 3793.75,5906.25 3806.25,5893.75 v1(3943.75,5893.75) ; v1(4963,6112) 4963.5,6112.5 4975,6112.5 5069.65,6017.85 U11.109@5069.65,5947.2
  Secondary Component Side w11: v1(449,4071) 400,4019.25 400,3302.75 687.5,3015.25 687.5,2074.75 543.75,1931 v1(508,1931) ; v1(3943.75,5893.75) 3964.25,5893.75 3970,5888 4100.5,5888 4162.5,5950 4787.5,5950 4950,6112.5 4962.5,6112.5 v1(4963,6112)
LED_PWR_GOOD_TPS: R22.2 U11.118 | length 7834.4
  Primary Component Side w11: v1(274,3772) 278.25,3772 418.75,3912.5 565.25,3912.5 1334,4681.25 2918.75,4681.25 2987.5,4750 3617.67,4750 3642.67,4773 4033,4773 v1(4034,4772) ; v1(4206.25,4950) 4206.25,4956.25 4687.5,5437.5 4687.5,5700 4892.35,5904.85 U11.118@4892.35,5947.2
  Primary Component Side w12: R22.2@442.5,2037.5 443,2037 v1(506,2037)
  Secondary Component Side w11: v1(4034,4772) 4034.65,4772 4206.25,4946.58 v1(4206.25,4950)
  Secondary Component Side w12: v1(274,3772) 268.75,3766.75 268.75,3656.25 275,3650 275,3125 393.75,3006.25 393.75,2743.75 437.5,2700 493.75,2700 543.75,2650 600,2650 656.25,2593.75 656.25,2118.75 574.5,2037 v1(506,2037)
LED_RAD: R17.2 U11.130 | length 8857.3
  Primary Component Side w11: v1(230,4335.5) 2301.23,6406.25 3150,6406.25 3187.5,6368.75 4143.75,6368.75 4193.75,6418.75 4281.25,6418.75 4362.5,6337.5 4418.75,6337.5 4655.95,6100.3 U11.130@4655.95,5947.2 ; R17.2@442.5,1518.75 448.75,1512.5 493.75,1512.5 511,1529.75 511,1534 v1(512,1535)
  Secondary Component Side w11: v1(230,4335.5) 230,3338.25 231,3337.25 231,3106.5 356.25,2981.25 356.25,2668.75 425,2600 481.25,2600 531.25,2550 600,2550 625,2525 625,2125 568.75,2068.75 494.62,2068.75 462.5,2036.63 462.5,1618.75 511,1570.25 511,1536 v1(512,1535)
LED_WDT: R19.2 U11.117 | length 8052.8
  Primary Component Side w11: R19.2@442.5,1725 v1(513,1725) ; v1(577,3853) v1@577,3858.25 ; 2937.5,4656.25 3006.25,4725 3637.5,4725 3650,4737.5 4061,4737.5 v1(4092.25,4768.75) ; v1(4440,4931) 4443.5,4931 4718.75,5206.25 4718.75,5682.15 4912.05,5875.45 U11.117@4912.05,5947.2
  Primary Component Side w12: v1@577,3858.25 1375,4656.25 2937.5,4656.25
  Secondary Component Side w11: v1(4092.25,4768.75) 4406.25,4768.75 4440,4802.5 v1(4440,4931)
  Secondary Component Side w12: v1(513,1725) 519.25,1731.25 606.25,1731.25 762.5,1887.5 762.5,3050 551,3261.5 551,3827 v1(577,3853)
MASTER_ENABLE: U10.2 U11.113 | length 3691.8
  Primary Component Side w11: U10.2@2343.75,5100 2481.25,5100 v1(2500,5118.75) ; v1(2625,5943.75) 2637.5,5956.25 3650,5956.25 3662.5,5968.75 v1(3875,5968.75) ; v1(4905,6161) 4905,6157.5 4925,6137.5 4925,6050 4950,6025 4968.75,6025 4990.85,6002.9 U11.113@4990.85,5947.2
  Secondary Component Side w11: v1(2500,5118.75) 2500,5818.75 v1(2625,5943.75) ; v1(3875,5968.75) 3975,5968.75 4000,5943.75 4068.75,5943.75 4143.75,6018.75 4687.5,6018.75 4829.75,6161 v1(4905,6161)
MASTER_ENABLE_OUT: J2.1 U10.4 | length 3969.9
  Primary Component Side w12: v1(2125,5456.25) 2240,5456.25 U10.4@2243.75,5460
  Secondary Component Side w12: J2.1@462.5,2850 462.5,3006.25 318.75,3150 318.75,4393.75 1381.25,5456.25 v1(2125,5456.25)
MRST: J16.B28 J16.C28 RN1.8 U11.141 | length 6196.3
  Primary Component Side w11: U11.141@4439.25,5947.2 4439.25,5673.25 4450,5662.5 v1(4450,5335) ; v1(5021,3650) 5063.5,3607.5 5063.5,3444.75 5262.5,3245.75 5262.5,2875 5606.25,2531.25 5606.25,2250 5768.75,2087.5 v1(5768.75,818.75) ; RN1.8@5642.75,818.75 v1(5693.75,818.75)
  Secondary Component Side w11: v1(4450,5335) 4450,5293.75 4656.25,5087.5 4743.75,5087.5 4868.75,4962.5 4868.75,4750 4712.5,4593.75 4712.5,3957.5 5020,3650 v1(5021,3650) ; v1(5693.75,818.75) v1(5768.75,818.75) 5878.25,818.75 J16.C28@5878.5,818.5 J16.B28@5978.5,818.5
MS_IN_1: J2.3 R15.1 U11.88 | length 9146.8
  Primary Component Side w11: U11.88@5238.45,5542 5376.75,5542 v1(5393.75,5559) ; R15.1@5725,5237.5 5737.5,5237.5 v1(5793.75,5181.25)
  Primary Component Side w12: J2.3@462.5,2750 918.75,2750 1043.75,2875 1300,2875 1343.75,2831.25 1343.75,2187.5 1393.75,2137.5 1606.25,2137.5 1650,2093.75 v1(1956.25,2093.75) ; v1(5687.5,5368.75) 5693.75,5368.75 5712.5,5350 5712.5,5300 5725,5287.5 R15.1@5725,5237.5
  Secondary Component Side w11: v1(5393.75,5559) 5393.75,5500 5368.75,5475 5368.75,5418.75 5418.75,5368.75 v1(5687.5,5368.75)
  Secondary Component Side w12: v1(1956.25,2093.75) 1962.5,2087.5 2143.75,2087.5 2843.75,2787.5 4856.25,2787.5 5825,3756.25 5825,4900 5831.25,4906.25 5831.25,5143.75 v1(5793.75,5181.25)
NetC2_1: C2.1 US3.14 | length 150.3
  Primary Component Side w12: C2.1@4318.75,8968.75 4318.75,8900 4325,8893.75 US3.14@4325,8821
NetC2_2: C2.2 R5.2 US3.15 | length 269.2
  Primary Component Side w12: R5.2@4130,8968.75 C2.2@4234.75,8968.75 4234.75,8915.25 4275,8875 US3.15@4275,8821
NetC11_1: C11.1 U1.14 | length 146.7
  Primary Component Side w12: C11.1@1025,1631.25 1062.5,1631.25 1075,1643.75 U1.14@1166.5,1643.75
NetC11_2: C11.2 R13.2 U1.15 | length 507.1
  Primary Component Side w12: R13.2@1025,1745 957.5,1745 931.25,1718.75 931.25,1587.5 971.5,1547.25 C11.2@1025,1547.25 1066,1547.25 1112.5,1593.75 U1.15@1166.5,1593.75
NetC12_1: C12.1 U1.6 | length 175
  Primary Component Side w12: U1.6@1362.5,1793.75 C12.1@1537.5,1793.75
NetC12_2: C12.2 R14.2 U1.7 | length 397.9
  Primary Component Side w12: U1.7@1362.5,1843.75 1475,1843.75 1509,1877.75 C12.2@1537.5,1877.75 1537.5,1968.75 1512.5,1993.75 R14.2@1430,1993.75
NetC43_2: C43.2 R26.2 U14.1 | length 401.7
  Primary Component Side w12: C43.2@2534,1968.75 2606.25,1968.75 2637.5,1937.5 2637.5,1898.75 ; U14.1@2584.78,1760.5 2604.25,1760.5 2637.5,1793.75 2637.5,1898.75 ; R26.2@2712.5,1898.75 2637.5,1898.75
NetC44_1: C44.1 U14.13 | length 196.3
  Primary Component Side w12: U14.13@2559.58,1508.98 2559.58,1547.08 2587.5,1575 C44.1@2706.25,1575
NetC45_2: C45.2 U14.12 | length 606.2
  Primary Component Side w12: U14.12@2533.22,1508.98 2533.22,1460.53 2575,1418.75 v1(2643.75,1418.75) ; C45.2@2800,1572.25 2800.25,1572 2868,1572 2877.5,1562.5 v1(2881.25,1562.5)
  Secondary Component Side w12: v1(2643.75,1418.75) 2818.75,1418.75 2881.25,1481.25 v1(2881.25,1562.5)
NetC49_1: C49.1 U16.4 | length 80.3
  Primary Component Side w15: U16.4@4062.5,6531.45 4124.8,6531.45 C49.1@4137.5,6518.75
NetD1_1: D1.1 SI1.2 | length 323.9
  Primary Component Side w50: SI1.2@2005,582.5 2137.25,582.5 2174.75,543.75 D1.1@2312.5,543.75
NetD1_2: D1.2 D2.2 U3.1 | length 1047.4
  Primary Component Side w50: D1.2@2592.5,543.75 2597.5,538.75 D2.2@2793.75,538.75 3326.25,538.75 3402.5,462.5 U3.1@3606.25,462.5
NetJ2_7: J2.7 J3.1 | length 726.8
  Primary Component Side w12: J2.7@462.5,2550 850,2550 975,2425 J3.1@1137.5,2425
NetJ2_8: J2.8 J4.1 | length 663
  Primary Component Side w12: J2.8@562.5,2500 725,2500 937.5,2287.5 J4.1@1137.5,2287.5
NetJ15_2: J15.2 U14.5 | length 252.3
  Primary Component Side w12: J15.2@2275,1700 2456.25,1700 2481.63,1725.38 U14.5@2481.63,1760.5
NetJP6_2: JP6.2 R32.1 | length 161.4
  Primary Component Side w20: JP6.2@5606.25,8856.25 5712.5,8856.25 5725,8843.75 R32.1@5762.5,8843.75
NetM1_1: M1.1 U14.8 | length 597.2
  Primary Component Side w6: v1(2393.75,1481.25) 2431.25,1492.9 U14.8@2431.25,1508.98
  Secondary Component Side w6: v1(2393.75,1481.25) 2300,1387.5 2300,1100 2337.5,1062.5 M1.1@2406.25,1062.5
NetR1_2: R1.2 US2.4 | length 181.6
  Primary Component Side w20: US2.4@5168.75,8462.5 5218.75,8462.5 5280,8401.25 R1.2@5280,8356.25
NetR3_1: R3.1 US2.1 | length 174.4
  Primary Component Side w20: R3.1@5031.25,8550 5031.25,8568.75 5075,8612.5 US2.1@5168.75,8612.5
NetR3_2: R3.2 U2.1 | length 109
  Primary Component Side w20: U2.1@4931.25,8400 5012.5,8400 5031.25,8418.75 R3.2@5031.25,8420
NetR6_2: R6.2 US3.2 US3.3 | length 207.2
  Primary Component Side w12: US3.2@4275,8625 US3.3@4325,8625 4325,8537.5 4342.5,8520 R6.2@4342.5,8475
NetR9_1: R9.1 U3.7 | length 252.4
  Secondary Component Side w30: U3.7@4306.25,2362.5 4306.25,2500 R9.1@4387.5,2581.25
NetR16_2: R16.2 U10.1 | length 439
  Primary Component Side w12: U10.1@2243.75,5100 2243.75,5068.75 2293.75,5018.75 2481.25,5018.75 2537.5,5075 R16.2@2607.5,5075
NetR17_1: R17.1 U13.1 | length 140.7
  Primary Component Side w12: U13.1@177,1531.25 300,1531.25 R17.1@312.5,1518.75
NetR18_1: R18.1 U13.2 | length 138.8
  Primary Component Side w12: U13.2@177,1631.25 181.25,1625 R18.1@312.5,1625
NetR19_1: R19.1 U13.3 | length 138.1
  Primary Component Side w12: U13.3@177,1731.25 306.25,1731.25 R19.1@312.5,1725
NetR20_1: R20.1 U13.4 | length 138.1
  Primary Component Side w12: U13.4@177,1831.25 306.25,1831.25 R20.1@312.5,1825
NetR21_1: R21.1 U13.5 | length 135.5
  Primary Component Side w12: U13.5@177,1931.25 R21.1@312.5,1931.25
NetR22_1: R22.1 U13.6 | length 138.1
  Primary Component Side w12: U13.6@177,2031.25 306.25,2031.25 R22.1@312.5,2037.5
NetR23_1: R23.1 U13.15 | length 280.1
  Primary Component Side w12: U13.15@77,2131.25 125,2081.25 243.75,2081.25 300,2137.5 R23.1@312.5,2137.5
NetR24_1: R24.1 U13.16 | length 262
  Primary Component Side w12: U13.16@77,2231.25 125,2281.25 222.73,2281.25 235.23,2268.75 R24.1@312.5,2268.75
NetR29_2: R29.2 U14.2 | length 103.7
  Primary Component Side w12: R29.2@2555,1862.5 2559.2,1858.3 U14.2@2559.2,1760.5
NetRN9_7: RN9.7 U1.10 | length 326.5
  Primary Component Side w12: RN9.7@1106.25,1988.5 1106.25,1956.25 1118.75,1943.75 1212.5,1943.75 1243.75,1912.5 1243.75,1856.25 1231.25,1843.75 U1.10@1166.5,1843.75
NetS1_2: S1.2 SI1.1 | length 426.6
  Primary Component Side w50: S1.2@931.25,643.75 1271.25,643.75 SI1.1@1332.5,582.5
NetU1_9: U1.9 U1.13 | length 328.7
  Primary Component Side w12: U1.13@1166.5,1693.75 1112.5,1693.75 1087.5,1718.75 1087.5,1868.75 1112.5,1893.75 U1.9@1166.5,1893.75
NVRAM_ADDRESS0: U11.129 U15.14 | length 2233.2
  Primary Component Side w11: U11.129@4675.65,5947.2 4675.65,6118.1 4462.5,6331.25 4462.5,7487.5 4700,7725 U15.14@4968.75,7725
NVRAM_ADDRESS1: U11.128 U15.13 | length 2128
  Primary Component Side w11: U11.128@4695.35,5947.2 4695.35,6135.9 4487.5,6343.75 4487.5,7425 4687.5,7625 U15.13@4968.75,7625
NVRAM_ADDRESS2: U11.126 U15.12 | length 1997.8
  Primary Component Side w11: U11.126@4734.75,5947.2 4734.75,6041 4743.75,6050 4743.75,6156.25 4543.75,6356.25 4543.75,7368.75 4700,7525 U15.12@4968.75,7525
NVRAM_ADDRESS3: U11.124 U15.11 | length 1929.3
  Primary Component Side w11: U11.124@4774.15,5947.2 4774.15,6163.35 4575,6362.5 4575,7356.25 4662.5,7443.75 4800,7443.75 4818.75,7425 U15.11@4968.75,7425
NVRAM_ADDRESS4: U11.123 U15.10 | length 1708.1
  Primary Component Side w11: v1(4612,7137) 4612.5,7137.5 4612.5,6362.5 4793.85,6181.15 U11.123@4793.85,5947.2
  Secondary Component Side w11: v1(4612,7137) 4612,7149.5 4787.5,7325 U15.10@4968.75,7325
NVRAM_ADDRESS5: U11.122 U15.9 | length 1612.7
  Primary Component Side w11: v1(4662,7140) 4662,7118.25 4643.75,7100 4643.75,6368.75 4813.55,6198.95 U11.122@4813.55,5947.2
  Secondary Component Side w11: v1(4662,7140) 4747,7225 U15.9@4968.75,7225
NVRAM_ADDRESS6: U11.121 U15.8 | length 1507.8
  Primary Component Side w11: v1(4712.5,7112.5) 4675,7075 4675,6375 4833.25,6216.75 U11.121@4833.25,5947.2
  Secondary Component Side w11: v1(4712.5,7112.5) 4725,7125 U15.8@4968.75,7125
NVRAM_ADDRESS7: U11.120 U15.7 | length 1390.1
  Primary Component Side w11: v1(4712.5,7012.5) 4712.5,7006.25 4706.25,7000 4706.25,6387.5 4852.95,6240.8 U11.120@4852.95,5947.2
  Secondary Component Side w11: v1(4712.5,7012.5) 4862.5,7012.5 4875,7025 U15.7@4968.75,7025
NVRAM_ADDRESS8: U11.119 U15.29 | length 1576.3
  Primary Component Side w11: v1(4737.5,7062.5) 4750,7050 4750,6987.5 4737.5,6975 4737.5,6393.75 4872.65,6258.6 U11.119@4872.65,5947.2
  Secondary Component Side w11: U15.29@4368.75,7125 4525,7125 4581.25,7068.75 4731.25,7068.75 v1(4737.5,7062.5)
NVRAM_ADDRESS9: U11.102 U15.28 | length 2060.5
  Primary Component Side w11: v1(4629,7226) 4649,7226 4781.25,7093.75 4781.25,6975 4762.5,6956.25 4762.5,6406.25 4950,6218.75 5000,6218.75 5306.25,5912.5 5306.25,5843.75 5280.3,5817.8 U11.102@5238.45,5817.8
  Secondary Component Side w11: U15.28@4368.75,7225 4630,7225 v1(4629,7226)
NVRAM_ADDRESS10: U11.101 U15.25 | length 2358.4
  Primary Component Side w11: v1(4673,7395) 4676,7392 4676,7261.25 4812.5,7125 4812.5,6962.5 4787.5,6937.5 4787.5,6418.75 4962.5,6243.75 5018.75,6243.75 5331.25,5931.25 5331.25,5825 5304.35,5798.1 U11.101@5238.45,5798.1
  Secondary Component Side w11: U15.25@4368.75,7525 4375,7518.75 4518.75,7518.75 4642.5,7395 v1(4673,7395)
NVRAM_ADDRESS11: U11.100 U15.27 | length 2308.5
  Primary Component Side w11: v1(4714,7311) 4843.75,7181.25 4843.75,6950 4818.75,6925 4818.75,6425 4975,6268.75 5037.5,6268.75 5356.25,5950 5356.25,5806.25 5328.4,5778.4 U11.100@5238.45,5778.4
  Secondary Component Side w11: U15.27@4368.75,7325 4606.25,7325 4620.25,7311 v1(4714,7311)
NVRAM_ADDRESS12: U11.99 U15.6 | length 1658.2
  Primary Component Side w11: U15.6@4968.75,6925 4868.75,6925 4843.75,6900 4843.75,6437.5 4981.25,6300 5043.75,6300 5381.25,5962.5 5381.25,5793.75 5346.2,5758.7 U11.99@5238.45,5758.7
NVRAM_ADDRESS13: U11.98 U15.30 | length 2129.3
  Primary Component Side w11: v1(4876,6875) 4876,6850 4868.75,6843.75 4868.75,6525 4918.75,6475 5012.5,6475 5043.75,6443.75 5043.75,6337.5 5406.25,5975 5406.25,5781.25 5364,5739 U11.98@5238.45,5739
  Secondary Component Side w11: U15.30@4368.75,7025 4556.25,7025 4606.25,6975 4712.5,6975 4812.5,6875 v1(4876,6875)
NVRAM_ADDRESS14: U11.97 U15.5 | length 1609
  Primary Component Side w11: U15.5@4968.75,6825 4912.5,6825 4893.75,6806.25 4893.75,6706.25 4925,6675 5000,6675 5025,6650 5025,6493.75 5075,6443.75 5075,6343.75 5437.5,5981.25 5437.5,5768.75 5388.05,5719.3 U11.97@5238.45,5719.3
NVRAM_ADDRESS15: U11.96 U15.33 | length 1852.7
  Primary Component Side w11: v1(5087.5,6637.5) 5150,6637.5 v1(5193.75,6593.75) ; v1(5181.25,5915.75) 5181.25,5893.75 5156.25,5868.75 5156.25,5731.25 5187.9,5699.6 U11.96@5238.45,5699.6
  Secondary Component Side w11: U15.33@4368.75,6725 4875,6725 4925,6675 5050,6675 v1(5087.5,6637.5) ; v1(5181.25,5915.75) 5181.25,6312.5 5193.75,6325 v1(5193.75,6593.75)
NVRAM_ADDRESS16: U11.95 U15.4 | length 1339.3
  Primary Component Side w11: U15.4@4968.75,6725 v1(5143.75,6725) ; v1(5112.5,5825) 5131.25,5806.25 5131.25,5712.5 5163.85,5679.9 U11.95@5238.45,5679.9
  Secondary Component Side w11: v1(5112.5,5825) 5137.5,5850 5137.5,6050 5156.25,6068.75 5156.25,6712.5 v1(5143.75,6725)
NVRAM_ADDRESS17: U11.93 U15.32 | length 2333.7
  Primary Component Side w11: v1(4947,5616) 4953.5,5616 4978,5640.5 U11.93@5238.45,5640.5
  Secondary Component Side w11: U15.32@4368.75,6825 4643.75,6825 4693.75,6775 5025,6775 5131.25,6668.75 5131.25,6125 4856.25,5850 4856.25,5705.75 4946,5616 v1(4947,5616)
NVRAM_ADDRESS18: U11.92 U15.3 | length 1647.4
  Primary Component Side w11: v1(4965,5579) 4965,5581.6 5004.2,5620.8 U11.92@5238.45,5620.8
  Secondary Component Side w11: v1(4965,5579) 4883.5,5579 4831.25,5631.25 4831.25,5875 5100,6143.75 5100,6562.5 5037.5,6625 U15.3@4968.75,6625
NVRAM_ADDRESS19: U11.91 U15.35 | length 1945.2
  Primary Component Side w11: v1(5061,6506) 5062,6507 5066.65,6507 5100,6476 5100,6356.25 5173,6283.25 5173,6282.33 5468.75,5989.07 5468.75,5756.25 5313.6,5601.1 U11.91@5238.45,5601.1
  Secondary Component Side w11: U15.35@4368.75,6525 4618.75,6525 4668.75,6475 5011,6475 5042,6506 v1(5061,6506)
NVRAM_ADDRESS20: U11.90 U15.2 | length 1424
  Primary Component Side w11: v1(5062.5,6550) 5075,6550 5143.75,6481.25 5143.75,6356.25 5500,6000 5500,5750 5331.4,5581.4 U11.90@5238.45,5581.4
  Secondary Component Side w11: U15.2@4968.75,6525 4975,6531.25 5000,6531.25 5018.75,6550 v1(5062.5,6550)
NVRAM_CE: U11.133 U15.24 | length 1803.9
  Primary Component Side w11: U15.24@4368.75,7625 4412.5,7625 4436,7601.5 4436,6506.25 4428,6495.25 v1(4428,6476) ; U11.133@4596.85,5947.2 v1(4596.85,6059.4)
  Secondary Component Side w11: v1(4428,6476) 4428,6462.5 4596.85,6293.75 v1(4596.85,6059.4)
NVRAM_DATA0: U11.188 U15.15 | length 4235.1
  Primary Component Side w11: v1(3407,5396) 3460.25,5396 3512.5,5343.75 3512.5,5293.65 3559.65,5246.5 U11.188@4053.75,5246.5
  Secondary Component Side w11: v1(3407,5396) 3287.5,5515.5 3287.5,6693.75 4168.75,7575 4637.5,7575 4887.5,7825 U15.15@4968.75,7825
NVRAM_DATA1: U11.190 U15.16 | length 4376.9
  Primary Component Side w11: v1(3434,5298) 3434,5297.25 3524.15,5207.1 U11.190@4053.75,5207.1
  Secondary Component Side w11: v1(3434,5298) 3250,5482 3250,6725 4200,7675 4512.5,7675 4762.5,7925 U15.16@4968.75,7925
NVRAM_DATA2: U11.192 U15.17 | length 4548.4
  Primary Component Side w11: v1(3410,5256) 3410,5252.5 3494.8,5167.7 U11.192@4053.75,5167.7
  Secondary Component Side w11: v1(3410,5256) 3218.75,5447.25 3218.75,6775 4218.75,7775 4493.75,7775 4743.75,8025 U15.17@4968.75,8025
NVRAM_DATA3: U11.193 U15.19 | length 4340.1
  Primary Component Side w11: v1(3378,5217) 3378,5215.75 3445.75,5148 U11.193@4053.75,5148
  Secondary Component Side w11: v1(3378,5217) 3187.5,5407.5 3187.5,6800 4256.25,7868.75 4256.25,7912.5 4318.75,7975 4418.75,7975 4450,8006.25 4450,8100 4425,8125 U15.19@4368.75,8125